# Altium PCB ESC_PCB_0.PcbDoc
Units mil, origin at the board's own origin, x right, y up, seen from the top; angles counter-clockwise.
Board outline 1100 x 2230 mil, 4 copper layers (Top Layer, GND, 11V1, Bottom Layer), stack 30.634 mil thick; 71 components, 44 nets, 282 pads, 41 vias.
Unrouted connection lines stored in the file: 15.
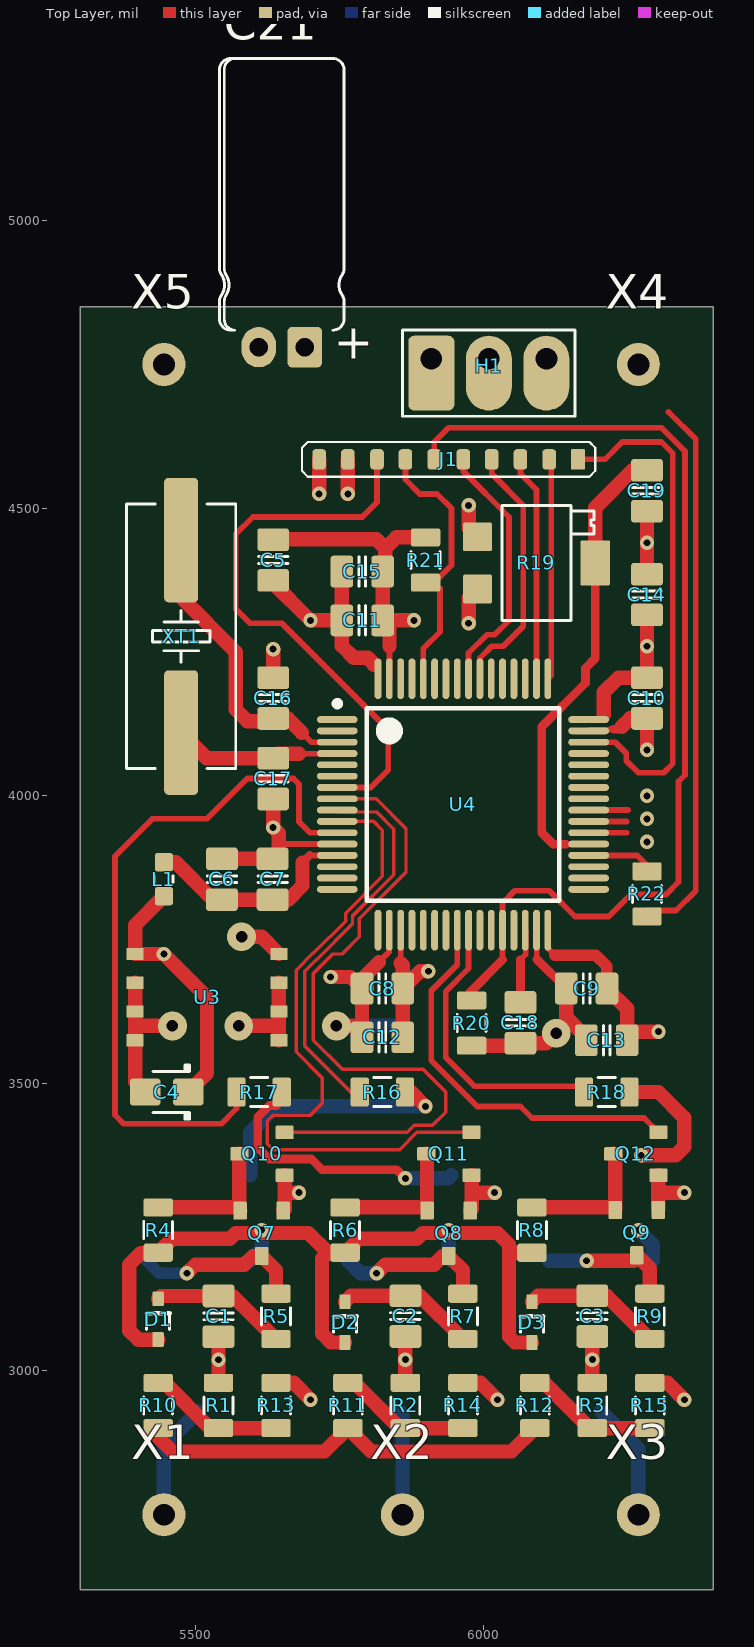
[diagram p0: Top Layer view]
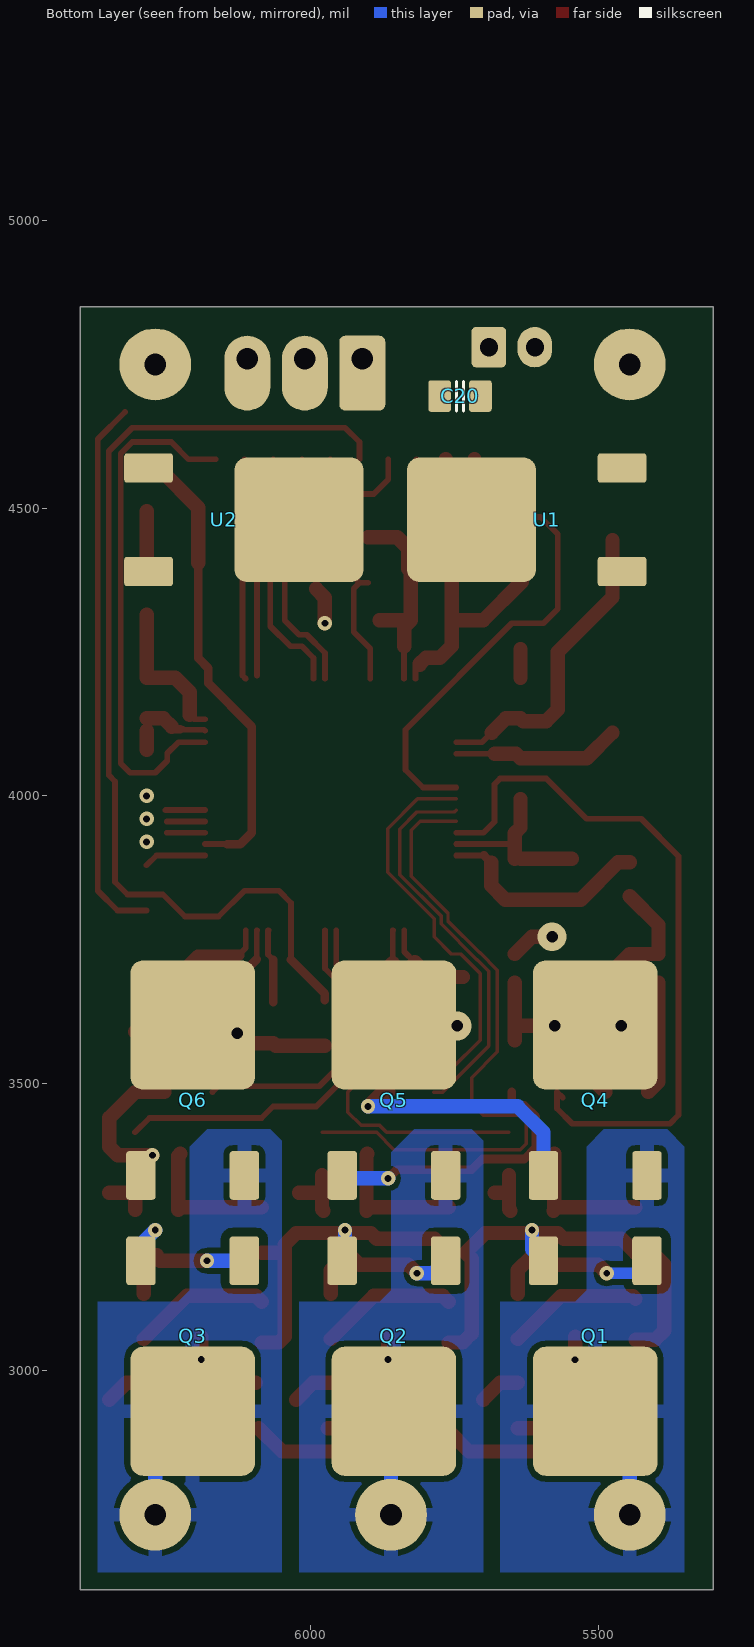
[diagram p1: Bottom Layer view, seen from below]
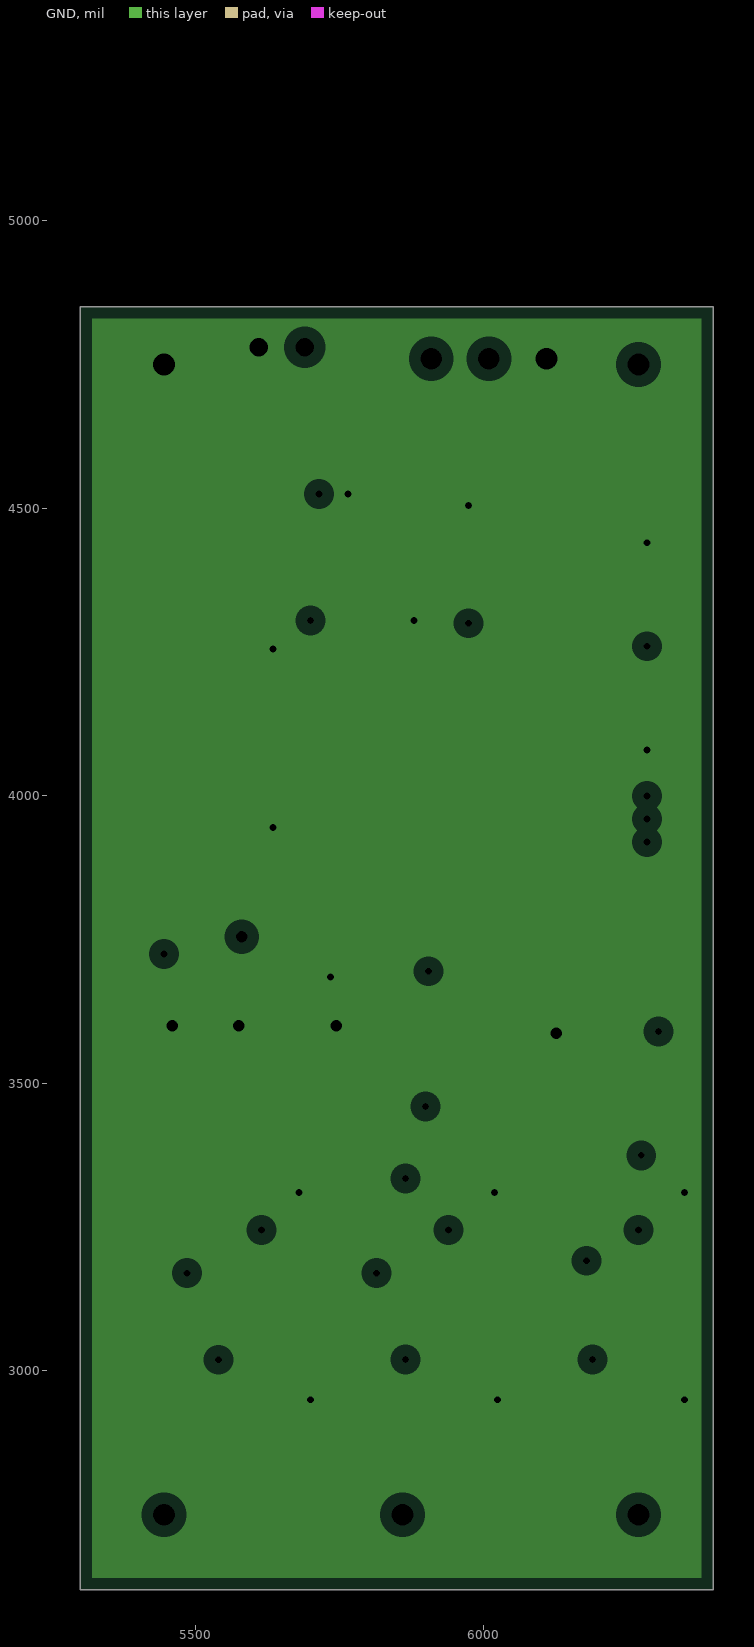
[diagram p2: GND, clearances drawn from the general rule]
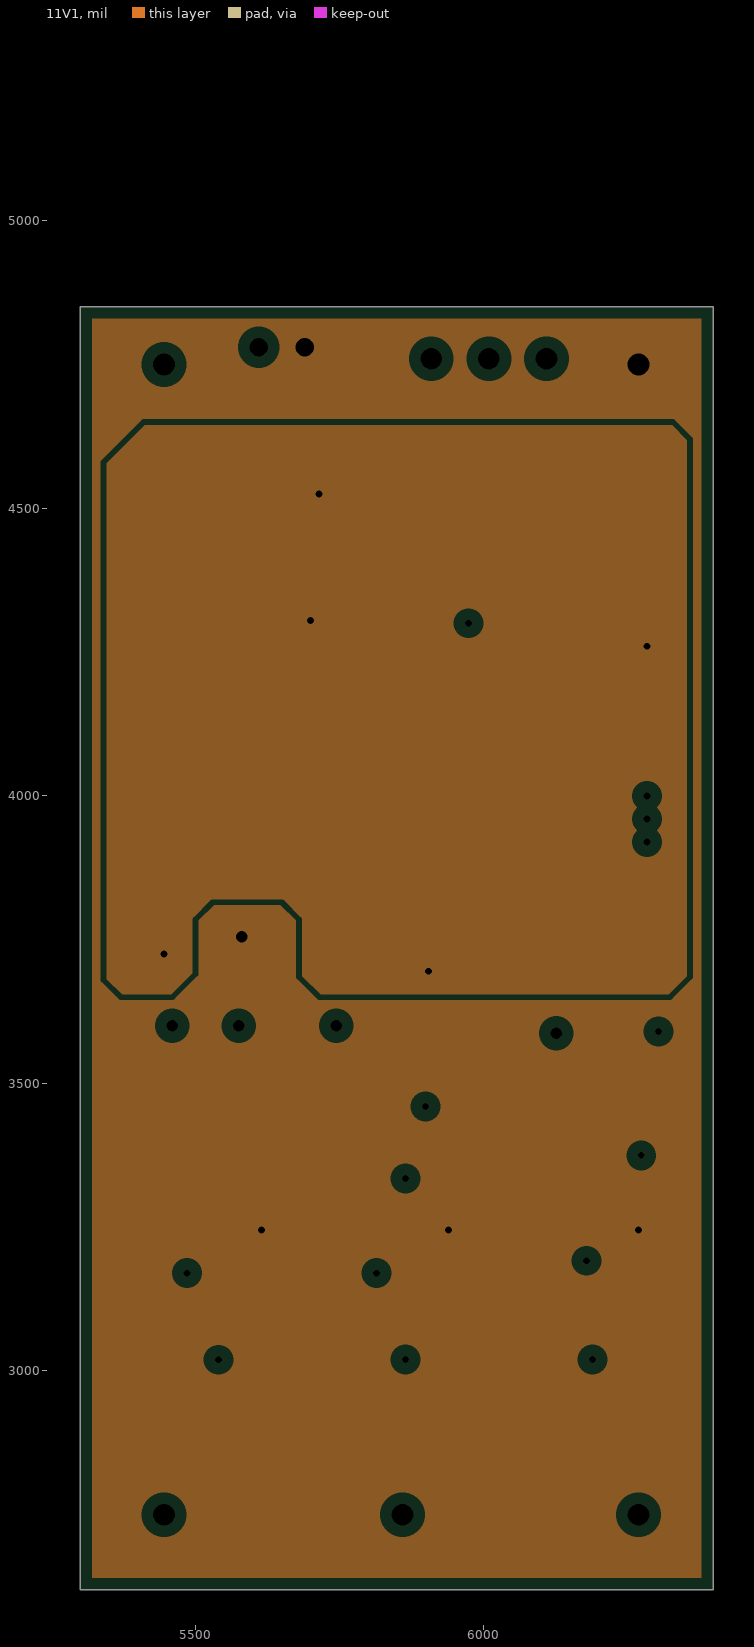
[diagram p3: 11V1, clearances drawn from the general rule]

## Layer stack, top to bottom
Top Solder: solder mask 0.4, Solder Resist, Dk 3.5
Top Layer: signal copper 1.4
Dielectric 1: core 10, FR-4, Dk 4.2
GND: plane copper 1.417, net GND
Dielectric 3: prepreg 5, Dk 4.2
11V1: plane copper 1.417, net (Multiple Nets)
Dielectric 2: core 10, Dk 4.2
Bottom Layer: signal copper 1.4
Bottom Solder: solder mask 0.4, Solder Resist, Dk 3.5

## Board outline
5300,2620 5300,4850 6400,4850 6400,2620

## Design rules (kind name [scope] priority, off if disabled: settings)
Clearance [All] p1: gap=10 ignorepadtopadclearanceinfootprint=FALSE except(0: Arc-Hole Track-Hole SMDPad-Hole THPad-Hole Via-Hole Fill-Hole Poly-Hole Region-Hole Text-Hole; 6: Arc-Arc Arc-Track Track-Track; 7: Arc-SMDPad Track-SMDPad SMDPad-SMDPad; 15: SMDPad-Poly)
PlaneClearance [All] p1: clearance=20
PlaneConnect [All] p1: planeconnectstyle=Relief reliefexpansion=20 reliefentries=4 reliefconductorwidth=10 reliefairgap=10
PolygonConnect [All] p1: connectstyle=Relief reliefconductorwidth=25 reliefentries=4 polygonreliefangle="90 Angle" airgapwidth=10
RoutingVias [All] p1: holewidth=28 width=50 viastyle="Through Hole" minholewidth=10 minwidth=15 maxholewidth=28 maxwidth=50
SilkToSilkClearance [All] p1: silktosilkclearance=7
SolderMaskExpansion [All] p1: expansion=4
Width [All] p1: maxlimit=100 minlimit=5 preferedwidth=25
27 further rules are at their usual default settings.

## Components (designator, comment, footprint, x,y, rotation, side; value= is the part's Value field where it differs from the comment)
C1 "approved sub OK" CAPC2012X135N 5540,3095 r90 top value=2µ2
C2 "approved sub OK" CAPC2012X135N 5865,3095.43 r90 top value=2µ2
C3 "approved sub OK" CAPC2012X135N 6190,3095.43 r90 top value=2µ2
C4 "10µ" CAPMP2012X150USR 5450,3485 r180 top
C5 "approved sub OK" CAPC2012X135N 5635,4410 r90 top value=4µ7
C6 "approved sub OK" CAPC2012X135N 5546,3855 r90 top value=1µ
C7 "approved sub OK" CAPC2012X135N 5634,3855 r90 top value=100n
C8 "approved sub OK" CAPC2012X135N 5825,3665 r180 top value=1µ
C9 "approved sub OK" CAPC2012X135N 6180,3665 r180 top value=1µ
C10 "approved sub OK" CAPC2012X135N 6285,4170 r270 top value=1µ
C11 "approved sub OK" CAPC2012X135N 5790,4305 r0 top value=1µ
C12 "approved sub OK" CAPC2012X135N 5825,3580 r180 top value=100n
C13 "approved sub OK" CAPC2012X135N 6215,3575 r180 top value=100n
C14 "approved sub OK" CAPC2012X135N 6285,4350 r90 top value=100n
C15 "approved sub OK" CAPC2012X135N 5790,4390 r0 top value=100n
C16 "approved sub OK" CAPC2012X135N 5635,4170 r270 top value=27p
C17 "approved sub OK" CAPC2012X135N 5635,4030 r90 top value=27p
C18 "approved sub OK" CAPC2012X135N 6065,3605.43 r270 top value=4µ7
C19 "approved sub OK" CAPC2012X135N 6285,4530.43 r270 top value=2µ2
C20 "approved sub OK" CAPC2012X135N 5740,4695 r180 bottom value=10µ
C21 "100µ" CAPAE200P550X1200_FLAT2 5650,4780 r0 top
D1 "1N4148" SOD523F 5435,3090 r270 top
D2 "1N4148" SOD523F 5760,3085 r270 top
D3 "1N4148" SOD523F 6085,3085 r270 top
H1 "*" HDR_1x3 6010.71,4735.35 r90 top
J1 "*" "SWJ-DP connector" 6195,4615 r180 top
L1 "*" INDUCTOR 5445,3855 r90 top
Q1 "*" TO-252_1 5594.96,3191.61 r270 bottom
Q2 "*" TO-252_1 5944.96,3191.61 r270 bottom
Q3 "*" TO-252_1 6294.96,3191.61 r270 bottom
Q4 "*" TO-252_1 5415,3340 r90 bottom
Q5 "*" TO-252_1 5765,3340 r90 bottom
Q6 "*" TO-252_1 6115,3340 r90 bottom
Q7 "*" TO-236 5577.6,3278.74 r0 top
Q8 "*" TO-236 5902.6,3278.74 r0 top
Q9 "*" TO-236 6230,3280 r0 top
Q10 "*" TO-236 5655,3414.8 r270 top
Q11 "*" TO-236 5980,3415 r270 top
Q12 "*" TO-236 6305,3415 r270 top
R1 "Thick Film" RESC2012X70N 5540,2940 r270 top value=44K2
R2 "Thick Film" RESC2012X70N 5865,2940 r270 top value=44K2
R3 "Thick Film" RESC2012X70N 6190,2940 r270 top value=44K2
R4 "Thick Film" RESC2012X70N 5435,3245 r90 top value=4K7
R5 "Thick Film" RESC2012X70N 5640,3095 r90 top value=1K5
R6 "Thick Film" RESC2012X70N 5760,3245 r90 top value=4K7
R7 "Thick Film" RESC2012X70N 5965,3095 r90 top value=1K5
R8 "Thick Film" RESC2012X70N 6085,3245 r90 top value=4K7
R9 "Thick Film" RESC2012X70N 6290,3095 r90 top value=1K5
R10 "Thick Film" RESC2012X70N 5435,2940 r90 top value=44K2
R11 "Thick Film" RESC2012X70N 5765,2940 r90 top value=44K2
R12 "Thick Film" RESC2012X70N 6090,2940 r90 top value=44K2
R13 "Thick Film" RESC2012X70N 5640,2940 r90 top value=10K
R14 "Thick Film" RESC2012X70N 5965,2940 r90 top value=10K
R15 "Thick Film" RESC2012X70N 6290,2940 r90 top value=10K
R16 "Thick Film" RESC2012X70N 5825,3485 r0 top value=86R6
R17 "Thick Film" RESC2012X70N 5610.63,3485 r0 top value=86R6
R18 "Thick Film" RESC2012X70N 6215,3485 r0 top value=86R6
R19 "5 Turn" TrimPot_SMD_Bourns_3214G 6092.64,4405 r180 top value=10K
R20 "Thick Film" RESC2012X70N 5980,3605 r270 top value=10K
R21 "Thick Film" RESC2012X70N 5900,4410 r90 top value=10K
R22 "Thick Film" RESC2012X70N 6285,3829.37 r270 top value=4K7
U1 "*" TO-252 5458.39,4569.96 r0 bottom
U2 "*" TO-252 6281.61,4390.04 r180 bottom
U3 "LM78L05ACM" SOIC_8 5395,3725 r270 top
U4 "" STM-LQFP64_N 5965,3985 r0 top
X1 "PHASE_A" THP_D38_T75_B125 5445,2750 r0 top
X2 "PHASE_B" THP_D38_T75_B125 5860,2750 r0 top
X3 "PHASE_C" THP_D38_T75_B125 6270,2750 r0 top
X4 "11V1" THP_D38_T75_B125 6270,4750 r0 top
X5 "GND" THP_D38_T75_B125 5445,4750 r0 top
XT1 "6.00MHz" CRYSTAL_HC49-US-SM 5475,4277.32 r90 top

## Footprints (in the part's own frame and the unit in brackets; to place one, negate y for a bottom-side part, rotate by r counter-clockwise, add the part's x,y. Pads: shape width x height; smd on the part's side, far side on the other; paste and mask are expansions set on the pad)
CAPAE200P550X1200_FLAT2 [mil]
  round 20 on Mech15: 0(0,0)
  rrect25% 60x70 hole 31.5: 1(40,0)
  oval 60x70 hole 31.5: 2(-40,0)
  silkscreen extent -108,30 108,502, body extent -107,-10 107,502, height 216
CAPC2012X135N [mm] "Chip Capacitor, Body 2.0x1.2mm, EIA 0805, IPC Medium Density"
  round 0.254 on Mech15: 0(0,0)
  rrect25% 1x1.4 smd: 1(-0.9,0) 2(0.9,0)
  Top Layer pour cut-out: -0.675,0.7 -0.475,0.9 0.475,0.9 0.675,0.7 0.675,-0.7 0.475,-0.9 -0.475,-0.9 -0.675,-0.7
  silkscreen extent -0.15,-0.65 0.15,0.65, body extent -1.1,-0.72 1.1,0.73, height 1.34
CAPMP2012X150USR [mm] "Molded body capacitor, Body 2.0x1.2mm, 0805, IPC Medium Density"
  round 0.254 on Mech15: 0(0,0)
  rrect25% 1.35x1.2 smd: 1(-0.95,0) 2(0.95,0)
  Top Layer pour cut-out: -0.4,0.8 0.4,0.8 0.4,-0.8 -0.4,-0.8
  silkscreen extent -1,-1.2 0.6,1.2, body extent -1.02,-0.67 1.03,0.68, height 1.5
CRYSTAL_HC49-US-SM [mm] "SMD Crystal HC49/US-SM package"
  round 0.508 on Mech15: 0(0,0)
  rrect25% 5.5x1.5 smd: 1(-4.25,0) 2(4.25,0)
  silkscreen extent -5.84,-2.41 5.84,2.41, body extent -6.4,-2.41 6.4,2.42, height 4.29
HDR_1x3 [mil]
  rrect25% 130x80 smd: 1(-0.35,100.71)
  rrect25% 130x80 smd far side: 1(-0.35,100.71)
  rrect25% 60x60 hole 38: 1(24.65,100.71)
  oval 130x80 smd: 2(-0.35,0.71) 3(-0.35,-99.29)
  oval 130x80 smd far side: 2(-0.35,0.71) 3(-0.35,-99.29)
  round 60 hole 38: 2(24.65,0.71) 3(24.65,-99.29)
  silkscreen extent -75,-149 75,151
INDUCTOR [mm] "Chip Ferrite, Body 1.6x0.8mm, 0603, IPC Medium Density"
  round 0.254 on Mech15: 0(0,0)
  rrect25% 0.8x0.8 smd: 1(-0.75,0) 2(0.75,0)
  Top Layer pour cut-out: -0.6,0.5 -0.4,0.7 0.4,0.7 0.6,0.5 0.6,-0.5 0.4,-0.7 -0.4,-0.7 -0.6,-0.5
  silkscreen extent -0.15,-0.41 0.15,0.41, body extent -0.87,-0.47 0.88,0.48, height 0.95
RESC2012X70N [mm] "Chip Resistor, Body 2.0x1.2mm, EIA 0805, IPC Medium Density"
  round 0.254 on Mech15: 0(0,0)
  rrect25% 0.8x1.3 smd: 1(-1,0) 2(1,0)
  Top Layer pour cut-out: -0.725,0.65 -0.525,0.85 0.525,0.85 0.725,0.65 0.725,-0.65 0.525,-0.85 -0.525,-0.85 -0.725,-0.65
  silkscreen extent -0.38,-0.64 0.38,0.64, body extent -1.1,-0.67 1.1,0.68, height 0.69
SOD523F [mm] "SOD-523F; 2 Leads; Body 1.3 x 0.9 mm, (LxW)"
  round 0.508 on Mech15: 0(0,0)
  rrect20% 0.65x0.5 smd: A(0.9,0) K(-0.9,0)
  Top Layer pour cut-out: -0.725,-0.25 -0.725,0.25 -0.525,0.45 0.525,0.45 0.725,0.25 0.725,-0.25 0.525,-0.45 -0.525,-0.45
  silkscreen extent -0.25,-0.51 0.45,0.51, body extent -0.85,-0.45 0.85,0.45, height 0.7
SOIC_8 [mm] "SOIC 8 Pin"
  rect 0.55x0.76 smd: 1(0,0) 2(1.27,0) 3(2.54,0) 4(3.81,0) 5(3.81,6.35) 6(2.54,6.35) 7(1.27,6.35) 8(0,6.35)
  body extent -0.6,0.08 4.41,6.27, height 1.76
STM-LQFP64_N [mm] "Thin QFP, 64-Leads, Body 10x10mm, Pitch 0.5mm, IPC Medium Density"
  oval 1.8x0.3 smd: 1(-5.55,3.75) 2(-5.55,3.25) 3(-5.55,2.75) 4(-5.55,2.25) 5(-5.55,1.75) 6(-5.55,1.25) 7(-5.55,0.75) 8(-5.55,0.25) 9(-5.55,-0.25) 10(-5.55,-0.75) 11(-5.55,-1.25) 12(-5.55,-1.75) 13(-5.55,-2.25) 14(-5.55,-2.75) 15(-5.55,-3.25) 16(-5.55,-3.75) 33(5.55,-3.75) 34(5.55,-3.25) 35(5.55,-2.75) 36(5.55,-2.25) 37(5.55,-1.75) 38(5.55,-1.25) 39(5.55,-0.75) 40(5.55,-0.25) 41(5.55,0.25) 42(5.55,0.75) 43(5.55,1.25) 44(5.55,1.75) 45(5.55,2.25) 46(5.55,2.75) 47(5.55,3.25) 48(5.55,3.75)
  oval 0.3x1.8 smd: 17(-3.75,-5.55) 18(-3.25,-5.55) 19(-2.75,-5.55) 20(-2.25,-5.55) 21(-1.75,-5.55) 22(-1.25,-5.55) 23(-0.75,-5.55) 24(-0.25,-5.55) 25(0.25,-5.55) 26(0.75,-5.55) 27(1.25,-5.55) 28(1.75,-5.55) 29(2.25,-5.55) 30(2.75,-5.55) 31(3.25,-5.55) 32(3.75,-5.55) 49(3.75,5.55) 50(3.25,5.55) 51(2.75,5.55) 52(2.25,5.55) 53(1.75,5.55) 54(1.25,5.55) 55(0.75,5.55) 56(0.25,5.55) 57(-0.25,5.55) 58(-0.75,5.55) 59(-1.25,5.55) 60(-1.75,5.55) 61(-2.25,5.55) 62(-2.75,5.55) 63(-3.25,5.55) 64(-3.75,5.55)
  silkscreen extent -5.67,-4.25 4.25,4.57, body extent -5,-5 5,5, height 1.6
"SWJ-DP connector" [mm] "10 pin SWJ-DP PCB connector"
  rrect8% 0.6x0.9 smd: 1(0.762,0.762)
  rrect50% 0.6x0.9 smd: 2(2.032,0.762) 3(3.302,0.762) 4(4.572,0.762) 5(5.826,0.762) 6(7.112,0.762) 7(8.382,0.762) 8(9.636,0.762) 9(10.922,0.762) 10(12.192,0.762)
  silkscreen extent 0,0 12.95,1.52
THP_D38_T75_B125 [mil] "Thru-Hole Pad with 75mil top and 125mil bottom annular rings"
  round 75 / inner round 75 / far side round 125 hole 38: 1(0,0)
TO-236 [mm] "TO-236"
  rrect20% 0.6x0.8 smd: 1(0,0) 2(1.9,0) 3(0.95,-2)
  body extent -0.55,-2.25 2.45,0.25, height 1.11
TO-252 [mm] "NDP Package  3-Pin TO-252"
  rrect20% 2.15x1.3 smd: 1(0,4.57) 3(0,0)
  rrect20% 5.7x5.5 smd: 2(6.645,2.285)
  body extent -0.34,-1.08 7.42,5.65, height 2.4
TO-252_1 [mm] "NDP Package  3-Pin TO-252"
  rrect20% 2.15x1.3 smd: 1(0,4.57) 3(0,0)
  rrect20% 5.7x5.5 smd: 2(6.645,2.285)
  body extent -0.89,-1.08 9.21,5.65, height 2.41
TrimPot_SMD_Bourns_3214G [mm] "Bourns- 3214G - TRIMMER"
  rrect10% 1.27x1.27 smd: 1(2.6,1.15) 3(2.6,-1.15)
  rrect10% 1.3x2 smd: 2(-2.6,0)
  silkscreen extent -2.54,-2.54 1.52,2.54, body extent -3,-2.4 3,2.4, height 3.9

## Part data
C1 C2 C3 C19: library part CAPC_2u2_0805, "Capacitor SMD Cer 2.2uF 10% 16V X7R 0805", Manufacturer 1=Kemet, Manufacturer Part Number 1=C0805C225K4RACTU, Package / Case="0805 (2012 metric)", Ratings="16V; X7R", Supplier Part Number 1=399-3523-1-ND, Tolerance=±10%, SCDType=undef, Supplier 1=Digi-Key
C4: library part CAPT_10u_0805_10V, "Capacitor SMD Tantalum 10uF 20% 10V 0805", Manufacturer 1="AVX Corporation", Manufacturer Part Number 1=TAJP106M010RNJ, Package / Case="0805 (2012 metric)", Ratings=10V, Supplier Part Number 1=478-3281-1-ND, Tolerance=±20%, Material=Tantalum, SCDType=spec, Supplier 1=Digi-Key
C5 C18: library part CAPC_4u7_0805, "Capacitor SMD Cer 4.7uF 10% 16V X5R 0805", Manufacturer 1="Taiyo Yuden", Manufacturer 2="Samsung Electro-Mechanics America, Inc", Manufacturer 3=Kemet, Manufacturer 4="Murata Electronics North America", Manufacturer 5="TDK Corporation", Manufacturer Part Number 1=EMK212BJ475KG-T, Manufacturer Part Number 2=CL21A475KOFNNNE, Manufacturer Part Number 3=C0805C475K4PACTU, Manufacturer Part Number 4=GRM21BR61C475MA88L, Manufacturer Part Number 5=C2012X5R1C475K125AC, Operating Temperature="-55°C ~ 85°C", Package / Case="0805 (2012 Metric)", Ratings="16V; X5R", Supplier Part Number 1=587-1294-1-ND, Tolerance=±10%, ComponentLink1Description=http://www.yuden.co.jp/productdata/catalog/en/mlcc01_e.pdf, ComponentLink1URL=http://www.yuden.co.jp/productdata/catalog/en/mlcc01_e.pdf, ComponentLink2Description=http://www.samsungsem.com/servlet/FileDownload?type=spec&file=CL21A475KOFNNNE.pdf, ComponentLink2URL=http://www.samsungsem.com/servlet/FileDownload?type=spec&file=CL21A475KOFNNNE.pdf, ComponentLink3Description=http://capacitoredge.kemet.com/capedge2/DataSheet?pn=C0805C475K4PACTU, ComponentLink3URL=http://capacitoredge.kemet.com/capedge2/DataSheet?pn=C0805C475K4PACTU, ComponentLink4Description=http://psearch.murata.com/capacitor/product/GRM21BR61C475MA88#.pdf, ComponentLink4URL=http://psearch.murata.com/capacitor/product/GRM21BR61C475MA88#.pdf, ComponentLink5Description=http://product.tdk.com/capacitor/mlcc/en/documents/mlcc_commercial_general_en.pdf, ComponentLink5URL=http://product.tdk.com/capacitor/mlcc/en/documents/mlcc_commercial_general_en.pdf, Material=ceramic, RoHS 1="RoHS Compliant", RoHS 2="RoHS Compliant", RoHS 3="RoHS Compliant", RoHS 4="RoHS Compliant", RoHS 5="RoHS Compliant", SCDType=spec, Size / Dimension="0.079\" L x 0.049\" W (2.00mm x 1.25mm)", Supplier 1=Digi-Key, Supplier 2=Digi-Key, Supplier 3=Digi-Key, Supplier 4=Digi-Key, Supplier 5=Digi-Key, Supplier Part Number 2=1276-1065-1-ND, Supplier Part Number 3=399-8101-1-ND, Supplier Part Number 4=490-7215-1-ND, Supplier Part Number 5=445-7640-1-ND, Thickness (Max)="0.053\" (1.35mm)"
C6 C8 C9 C10 C11: library part CAPC_1u_0805_X7R_16V_10%, "Capacitor SMD Cer 1uF 10% 16V X7R 0805", Manufacturer 1=Yageo, Manufacturer 2=Kemet, Manufacturer 3="Samsung Electro-Mechanics America, Inc", Manufacturer 4="TDK Corporation", Manufacturer Part Number 1=CC0805KKX7R7BB105, Manufacturer Part Number 2=C0805C105K4RACTU, Manufacturer Part Number 3=CL21B105KOFNNNE, Manufacturer Part Number 4=C2012X7R1C105K125AA, Package / Case="0805 (2012 metric)", Ratings="16V; X7R", Supplier Part Number 1=311-1365-6-ND, Temperature Coefficient=X7R, Tolerance=±10%, ComponentLink1Description=http://www.yageo.com/documents/recent/UPY-GPHC_X7R_6.3V-to-50V_8.pdf, ComponentLink1URL=http://www.yageo.com/documents/recent/UPY-GPHC_X7R_6.3V-to-50V_8.pdf, ComponentLink2Description=http://www.kemet.com/datasheets&C0805C105K4RACTU, ComponentLink2URL=http://www.kemet.com/datasheets&C0805C105K4RACTU, ComponentLink3Description=http://www.samsungsem.com/servlet/FileDownload?type=spec&file=CL21B105KOFNNNE.pdf, ComponentLink3URL=http://www.samsungsem.com/servlet/FileDownload?type=spec&file=CL21B105KOFNNNE.pdf, ComponentLink4Description=http://product.tdk.com/capacitor/mlcc/en/documents/mlcc_commercial_general_en.pdf, ComponentLink4URL=http://product.tdk.com/capacitor/mlcc/en/documents/mlcc_commercial_general_en.pdf, Material=ceramic, RoHS 1="RoHS Compliant", RoHS 2="RoHS Compliant", RoHS 3="RoHS Compliant", RoHS 4="RoHS Compliant", SCDType=spec, Supplier 1=Digi-Key, Supplier 2=Digi-Key, Supplier 3=Digi-Key, Supplier 4=Digi-Key, Supplier Part Number 2=399-1284-6-ND, Supplier Part Number 3=1276-1026-6-ND, Supplier Part Number 4=445-1358-6-ND
C7 C12 C13 C14 C15: library part CAPC_100n_0805_X7R_50V_10%, "Capacitor SMD Cer 100nF 10% 50V X7R 0805", Manufacturer 1=Kemet, Manufacturer Part Number 1=C0805C104K5RACTU, Package / Case="0805 (2012 metric)", Ratings="50V; X7R", Supplier Part Number 1=399-1170-1-ND, Tolerance=±10%, Material=ceramic, SCDType=undef, Supplier 1=Digi-Key
C16 C17: library part CAPC_27p_0805_NP0_50V_5%, "Capacitor SMD Cer 27pF 5% 50V NP0 0805", Manufacturer 1="Panasonic - ECG", Manufacturer Part Number 1=ECJ-2VC1H270J, Operating Temperature="-55°C ~ 125°C", Package / Case="0805 (2012 metric)", Ratings="50V; NP0", Supplier Part Number 1=PCC270CGCT-ND, Tolerance=±5%, SCDType=undef, Supplier 1=Digi-Key
C20: library part CAPC_10u_0805_16V, "Capacitor SMD Cer 10uF 10% 16V X7R 0805", Manufacturer 1=Samsung, Manufacturer Part Number 1=CL21B106KBN, Package / Case="0805 (2012 metric)", Ratings="16V; X7R", Tolerance=±10%, Material=ceramic, SCDType=undef
C21: library part CAPE_100u_16V_THD, "Capacitor THD Electrolytic 100uF 20% 16V Radial", Manufacturer="Panasonic - ECG", Manufacturer Part Number=ECA-1CM101, Package / Case="Radial - Through hole", Ratings=16V, Supplier Part Number 1=P5138-ND, Tolerance=±20%, Material="Aluminum Electrolytic", SCDType=spec, Supplier 1=Digi-Key
D1 D2 D3: library part DIODE_1N4148_200mA_SOD523F, "Diode SMD small signal 0.2A SOD-523F", Manufacturer 1="Fairchild Semiconductor", Manufacturer Part Number 1=1N4148WT, Package / Case="SC-79, SOD-523F", Ratings="Vr=75V; Vf=1V@10mA; Io=200mA", Supplier Part Number 1=1N4148WTCT-ND, ComponentLink1Description=http://www.fairchildsemi.com/ds/1N/1N914BWT.pdf, ComponentLink1URL=http://www.fairchildsemi.com/ds/1N/1N914BWT.pdf, Material=Si, SCDType=source, Supplier 1=Digi-Key
H1: library part Header3P, "Header, 2-pin"
J1: library part "SWJ-Debug Port", "10 pin Serial Wire JTAG Debug Port"
L1: library part Inductor, "0603 Inductor"
Q1 Q2 Q3 Q4 Q5 Q6: library part PHD82N, "PHD82N N-Channel MOSFET transistor"
Q7 Q8 Q9 Q10 Q11 Q12: library part PDTC143Z, "NPN Resistor-Equipped Transistor (RET)"
R1 R2 R3 R10 R11 R12: library part RES_44K2_0805_1%, "Resistor SMD chip 44.2k Ohm 0.125W 1% 0805", Manufacturer 1=Vishay/Dale, Manufacturer Part Number 1=CRCW080544K2FKEA, Package / Case="0805 (2012 metric)", Ratings=1/8W, Supplier Part Number 1=541-44.2KCCT-ND, Tolerance=±1%, SCDType=spec, Supplier 1=Digi-Key
R4 R6 R8: library part RES_4K7_0805_1%, "Resistor SMD chip 4.7k Ohm 0.125W 1% 0805", Manufacturer 1=Vishay/Dale, Manufacturer Part Number 1=CRCW08054K70FKEA, Package / Case="0805 (2012 metric)", Ratings=1/8W, Supplier Part Number 1=541-4.70KCCT-ND, Tolerance=±1%, SCDType=spec, Supplier 1=Digi-Key
R5 R7 R9: library part RES_1K5_0805_1%, "Resistor SMD chip 1.5k Ohm 0.125W 1% 0805", Manufacturer 1=Vishay/Dale, Manufacturer Part Number 1=CRCW08051K50FKEA, Package / Case="0805 (2012 metric)", Ratings=1/8W, Supplier Part Number 1=541-1.50KCCT-ND, Tolerance=±1%, SCDType=spec, Supplier 1=Digi-Key
R13 R14 R15: library part RES_10K_0805_1%, "Resistor SMD chip 10k Ohm 0.125W 1% 0805", Manufacturer 1=Vishay/Dale, Manufacturer Part Number 1=CRCW080510K0FKEA, Package / Case="0805 (2012 metric)", Ratings=1/8W, Supplier Part Number 1=541-10.0KCCT-ND, Tolerance=±1%, Material="Thick Film", SCDType=spec, Supplier 1=Digi-Key
R16 R17 R18: library part RES_86R6_0805_1%, "Resistor SMD chip 86.6 Ohm 0.125W 1% 0805", Manufacturer=Vishay/Dale, Manufacturer Part Number=CRCW080586R6FKEA, Package / Case="0805 (2012 metric)", Ratings=1/8W, Supplier Part Number 1=541-86.6CCT-ND, Tolerance=±1%, SCDType=spec, Supplier 1=Digi-Key
R19: library part RES_TRIMMER_10K_5T_SMD, "Trimmer SMD 10K 250mW 5-turn Side-adjust", Manufacturer 1="Bourns Inc.", Manufacturer Part Number 1=3214G-1-103E, Ratings="5 turn variable cermet", Supplier Part Number 1=3214G-1-103ECT-ND, Tolerance=10%, Number of Turns=5, SCDType=spec, Supplier 1=Digi-Key
R20 R21: library part RES_10K_0805_5%, "Resistor SMD chip 10k Ohm 0.125W 5% 0805", Manufacturer 1=Yageo, Manufacturer Part Number 1=RC0805JR-0710KL, Package / Case="0805 (2012 metric)", Ratings="1/8 W", Supplier Part Number 1=311-10KARCT-ND, Tolerance=±5%, Material="Thick Film", SCDType=spec, Supplier 1=Digi-Key
R22: library part RES_4K7_0805_5%, "Resistor SMD chip 4.7k Ohm 0.125W 5% 0805", Manufacturer 1=Yageo, Manufacturer Part Number 1=RC0805JR-074K7L, Package / Case="0805 (2012 metric)", Ratings="1/8 W", Supplier Part Number 1=311-4.7KARCT-ND, Tolerance=±5%, Material="Thick Film", SCDType=spec, Supplier 1=Digi-Key
U1 U2: library part LM78M05CDT, "LM78L05"
U3: "100-mA Fixed Output Linear Regulator"
U4: library part STM32F401RBT6, "ARM Cortex-M4 32-bit MCU+FPU, 105 DMIPS, 128 kB Flash, 64 kB Internal RAM, 48 I/Os, 64-pin LQFP, -40 to 85 degC, Tray", I/Os (High Current)=48, Manufacturer=STMicroelectronics, Operating Frequency(F) (Processor speed) (MHz)=84, Supplier Part Number 1=19X6220, Supply Voltage(Vcc) max (V)=3.6, Supply Voltage(Vcc) min (V)=1.8, ComponentLink1Description="Manufacturer URL", ComponentLink1URL=http://www.st.com/web/en/home.html, ComponentLink2Description=Datasheet, ComponentLink2URL=http://www.st.com/st-web-ui/static/active/en/resource/technical/document/data_brief/DM00071938.pdf, ComponentLink3Description="Package Specification", ComponentLink3URL=http://www.st.com/st-web-ui/static/active/en/resource/technical/document/datasheet/DM00037051.pdf, Core="ARM Cortex-M4", DatasheetVersion="Rev. 1", FLASH Size (Prog) (kB)=128, Internal RAM Size (kB)=64, Mounting Technology="Surface Mount", PackageDescription="64-Pin Low Profile Quad Flat Package, 10 x 10 mm Body, 0.5 mm Pitch", PackageReference=LQFP64, PackageVersion="Rev. 4, 06/2013", Packing=Tray, PartNumber=STM32F401RBT6, Supplier 1=Newark, Supplier 2=Mouser, Supplier Part Number 2=511-STM32F401RBT6
X1 X2 X3 X4 X5: library part Term1
XT1: library part Crystal_6MHz_HC49/US, "Resonator Ceramic 6.00 MHz 30ppm", Frequency=6MHz, Frequency Stability=±50ppm, Frequency Tolerance=±30ppm, Load Capacitance=18pF, Manufacturer 1="CTS-Frequency Controls", Manufacturer Part Number 1=ATS060BSM-1, Operating Mode=Fundamental, Operating Temperature="-20°C ~ 70°C", Package / Case=HC49/US-SM, Ratings="6.00 MHz", Supplier Part Number 1=CTX882CT-ND, ComponentLink1Description=http://www.ctscorp.com/components/Datasheets/008-0309-0.pdf, ComponentLink1URL=http://www.ctscorp.com/components/Datasheets/008-0309-0.pdf, Mounting Type="Surface Mount", Parameter Name="0.169\" (4.30mm)", SCDType=spec, Size / Dimension="0.437\" L x 0.190\" W (11.10mm x 4.83mm)", Supplier 1=Digi-Key, Type="MHz Crystal"

## Via types
v1: diameter 25, hole 12, Top Layer to Bottom Layer, 16 vias
v2: diameter 25, hole 12, Top Layer to GND, 14 vias
v3: diameter 25, hole 12, Top Layer to 11V1, 6 vias
v4: diameter 50, hole 20, Top Layer to Bottom Layer, 5 vias

## Nets (pads, with @x,y where several pads share a name; then routed paths per layer and width w, separated by ;. In a path a pad name is that pad's centre, name@x,y a point inside that pad or via, vN(x,y) a via of type N, cw(c..) or ccw(c..) an arc to the next point about the centre after c; other vN are vias at no path point)
3V3: C4.1 C5.1 C8.1 C9.1 C10.1 C11.1 C12.1 C13.1 C14.1 C15.1 J1.10 L1.1 U3.1 U4.19 U4.32 U4.48 U4.64 | length 1748.9
  Top Layer w10: U4.64 U4.64@5817.36,4227.64 ; U4.19 5857,3766.23 5857,3709 ; U4.32 6112.64,3735.36 6125,3723 ; U4.48@6183.5,4132.95 6202.5,4132.95 6210,4140.45
  Top Layer w20: 6125,3723 6196,3723 6215.43,3703.57 C9.1
  Top Layer w25: L1.1 5395,3775.47 U3.1 v3(5445,3725) 5520,3650 5520,3517.6 C4.1 ; C5.1@5632.72,4372.28 v3(5700,4305) C11.1 ; v3(5715,4525) J1.10 ; C15.1 C11.1 ; 5809.86,4227.64 5809.86,4229.42 5799.28,4240 5775,4240 5754.57,4260.43 C11.1 ; 5857,3709 5860.43,3705.57 C8.1 ; C12.1 C8.1 ; v3(5905,3695) 5890.43,3695 C8.1 ; 6210,4140.45 6210,4180 6235.43,4205.43 C10.1 v3(6285,4260) C14.1 ; C9.1 6250.43,3630 C13.1 6265.43,3590 v3(6305,3590)
5V: C20.1 H1.1 U1.2 U2.2
11V1: C21.1 D1.A D2.A D3.A Q1.3 Q2.3 Q3.3 R4.1 R6.1 R8.1 R19.1 U1.1 U2.1 U3.8 X4.1 | length 1621.9
  Top Layer w25: D1.A 5400.43,3054.57 5385,3070 5385,3185 5405,3205 5434.37,3205 R4.1 5459.37,3230 5560,3230 5570,3240 5696.26,3240 5730.63,3205.63 5720,3195 5720,3065 5735.43,3049.57 D2.A ; v4(5580,3755) 5615,3755 U3.8 ; R6.1 5784.37,3230 5885,3230 5895,3240 6025,3240 6045,3220 6045,3205 ; v1(5975,4300) 5975,4344.45 R19.1 ; D3.A 6055.43,3049.57 6045,3060 6045,3205 ; R8.1 6045.63,3205.63 6045,3205
  Bottom Layer w25: Q1.3 5615,3211.65 v1(5615,3245) ; v1(5940,3245) 5940,3196.57 Q2.3 ; v1(6270,3245) 6294.96,3220.04 Q3.3
BOOT0: J1.7 R21.1 U4.60 | length 475.7
  Top Layer w10: J1.7 5865,4550 5890,4525 5920,4525 5945,4500 5945,4400.87 R21.1@5914.76,4370.63 ; U4.60 5896.1,4256.1 5925,4285 5925,4360.39 R21.1@5914.76,4370.63 ; R21.1 R21.1@5914.76,4370.63
BOOT1: J1.6 R20.1 U4.28 | length 1799.2
  Top Layer w10: J1.6 5915,4615 5940,4640 6310,4640 6351,4599 6351,4036 6340,4025 6340,3850 6318.38,3828.38 6256.75,3828.38 6218.37,3790 6160,3790 6115,3835 6055,3835 6033.9,3813.9 U4.28 6033.9,3715.1 6034,3715
  Top Layer w15: R20.1@5975,3644.37 5975,3656 6034,3715
GATE_AH: Q1.1 Q7.3 R5.2 | length 297.3
  Top Layer w25: v1(5485,3170) 5500,3185 5585,3185 5600,3200 Q7.3 5640,3175 R5.2
  Bottom Layer w20: Q1.1 5436.65,3170 v1(5485,3170)
GATE_AL: Q4.1 R16.2 | length 444.7
  Top Layer w25: R16.2 5875,3485 v1(5900,3460)
  Bottom Layer w25: Q4.1 5595,3340.08 5595,3415 5640,3460 v1(5900,3460)
GATE_BH: Q2.1 Q8.3 R7.2 | length 272.3
  Top Layer w25: v1(5815,3170) 5830,3185 5915,3185 5930,3200 Q8.3 5965,3175 R7.2
  Bottom Layer w25: Q2.1 5786.65,3170 v1(5815,3170)
GATE_BL: Q5.1 R17.2 | length 481.9
  Top Layer w15: R17.2@5641.26,3461.5 5628.17,3461.5 5608.5,3441.83 5608.5,3388.17 5628.17,3368.5 5701.5,3368.5 5720,3350 5850,3350 v1(5865,3335) ; R17.2@5641.52,3461.75 5650,3470.24 R17.2
  Bottom Layer w25: v1(5865,3335) 5939.92,3335 Q5.1
GATE_CH: Q3.1 Q9.3 R9.2 | length 234.9
  Top Layer w25: v1(6180,3191.61) 6261.61,3191.61 6267.4,3197.4 Q9.3 6290,3178.66 R9.2
  Bottom Layer w25: Q3.1 v1(6180,3191.61)
GATE_CL: Q6.1 R18.2 | length 245.5
  Top Layer w25: R18.2 6305,3485 6350,3440 6350,3390 6335,3375 v1(6275,3375)
GND: C4.2 C5.2 C6.2 C7.2 C8.2 C9.2 C10.2 C11.2 C12.2 C13.2 C14.2 C15.2 C16.1 C17.1 C18.2 C19.2 C20.2 C21.2 H1.3 J1.9 Q4.2 Q5.2 Q6.2 Q7.2 Q8.2 Q9.2 Q10.2 Q11.2 Q12.2 R13.2 R14.2 R15.2 R19.3 R20.2 R21.2 U1.3 U2.3 U3.2 U3.3 U3.4 U3.5 U3.6 U3.7 U4.12 U4.18 U4.31 U4.47 U4.63 X5.1 | length 3062.2
  Top Layer w10: 5645,3918 5646.9,3916.1 U4.12 ; 5819,3711 5837.05,3729.05 U4.18 ; U4.63@5837.36,4203.5 5837.36,4260 ; U4.31 6093.5,3765.95 6093.5,3716.07 ; U4.47 6185.28,4114.73 6221.72,4114.73 6221.72,4116 6227,4116
  Top Layer w15: 6093.5,3716.07 C9.2 ; 6227,4116 6237,4116 6241,4120
  Top Layer w25: U3.2 U3.3 5395,3600 ; C4.2 5395,3502.6 U3.4 5395,3600 ; v4(5460,3600) 5395,3600 ; C6.2 C7.2 ; v4(5575,3600) 5645,3600 ; C17.1 v2(5635,3945) 5645,3935 5645,3918 C7.2@5645,3890.43 ; C16.1 v2(5635,4255) ; C5.2@5635,4446 5814,4446 5830,4430 ; R13.2 5670.63,2979.37 v2(5700,2950) ; U3.5 5645,3600 ; U3.7 U3.6 5645,3600 ; Q7.2 5655,3281.34 5655,3310 ; Q10.2 5655,3310 ; v2(5680,3310) 5655,3310 ; v2(5735,3685) 5769.57,3685 C8.2 ; v4(5745,3600) 5789.57,3600 C8.2 ; v2(5765,4525) J1.9 ; 5819,3711 5789.57,3681.57 C8.2 ; 5837.36,4260 5837.36,4293.07 C11.2 ; v2(5880,4305) C11.2 ; R21.2 5849.37,4449.37 5830,4430 ; R14.2 5995.63,2979.37 v2(6025,2950) ; R20.2@5975,3565.63 R20.2 6060.63,3565.63 C18.2 6110,3570 v4(6127.28,3587.28) 6144.57,3604.57 6144.57,3614.93 ; v2(5975,4505) 5975,4465.55 R19.3 ; Q8.2 5980,3281.34 5980,3310 ; Q11.2 5980,3310 ; v2(6020,3310) 5980,3310 ; C9.2 6144.57,3614.93 ; C13.2 6179.57,3579.93 6144.57,3614.93 ; 6241,4120 6255.57,4134.57 C10.2 ; v2(6285,4080) 6285,4112.95 ; C14.2 v2(6285,4440) C19.2 ; R15.2 6320.63,2979.37 v2(6350,2950) ; Q9.2 6304.8,3310 ; Q12.2 6304.8,3340 6304.8,3310 ; v2(6350,3310) 6304.8,3310 ; C11.2 C15.2 5830,4394.57 5830,4430
  Bottom Layer w25: v4(5745,3600) 5853.35,3600 Q5.2
HSA: Q10.1 U4.8 | length 1181.8
  Top Layer w6: Q10.1 5867.83,3414.8 5880.03,3427 5912,3427 5935,3450 5935,3485 5895,3525 5755,3525 5705,3575 5705,3691.06 5738.94,3725 5755,3725 5785,3755 5785,3786.16 5866,3867.16 5866,3942.84 5814,3994.84 U4.8
HSB: Q11.1 U4.10 | length 1160.1
  Top Layer w6: U4.10 5809.53,3955.47 5825,3940 5825,3860.1 5761,3796.1 5761,3782.26 5705.74,3727 5705.03,3727 5675,3696.97 5675,3555 5720,3510 5720,3465 5700,3445 5635,3445 5625,3435 5625,3395 5635,3385 5855,3385 5885,3415 Q11.1
HSC: Q12.1 U4.24 | length 692
  Top Layer w10: U4.24 5955.16,3706.27 5910,3661.11 5910,3540 5990,3460 6065,3460 6085,3440 6280,3440 Q12.1
JTCK/SWCLK: J1.2 U4.49 | length 385.4
  Top Layer w10: U4.49 6118.5,4209.36 6118.5,4581.5 J1.2
JTDI: J1.3 U4.50 | length 387.6
  Top Layer w10: J1.3 6065,4560 6092.9,4532.1 U4.50@6092.9,4209
JTDO/TRACESWO: J1.4 U4.55 | length 447.1
  Top Layer w10: U4.55@5994.84,4203.5 5994.84,4239.84 6015,4260 6035,4260 6070,4295 6070,4505 6015,4560 J1.4
JTMS/SWDIO: J1.1 U4.46 | length 907.5
  Top Layer w10: J1.1 6212,4585 6242,4615 6310,4615 6330,4595 6330,4056 6314,4040 6270,4040 6249,4061 6249,4074 6229.73,4093.27 U4.46
LSA: R16.1 U4.9 | length 682.6
  Top Layer w6: U4.9 5749.78,3971.88 5815.04,3971.88 5845,3941.92 5845,3863.13 5773,3791.13 5773,3777.29 5710.71,3715 5710,3715 5690,3695 5690,3565 5770,3485 R16.1
LSB: R17.1 U4.11 | length 1241
  Top Layer w10: R17.1@5561.26,3475 R17.1 5571.26,3456.26 5545,3430 5375,3430 5360,3445 5360,3895 5425,3960 5520,3960 5590,4030 5670.43,4030 5670.43,4029.57 5680,4020 5680,3955 5699.21,3935.79 U4.11
LSC: R18.1 U4.25 | length 498.5
  Top Layer w10: U4.25 5974.84,3699.84 5935,3660 5935,3545 5985,3495 6160.63,3495 R18.1@6170.63,3485
NetC1_2: C1.2 D1.K R5.1 | length 238.1
  Top Layer w25: D1.K 5440,3130.43 C1.2 5564.57,3130.43 5639.37,3055.63 R5.1
NetC2_2: C2.2 D2.K R7.1 | length 240.5
  Top Layer w25: D2.K 5770.43,3130.87 C2.2 5889.76,3130.87 R7.1
NetC3_2: C3.2 D3.K R9.1 | length 240.5
  Top Layer w25: D3.K 6095.43,3130.87 C3.2 6214.76,3130.87 R9.1
NetQ7_1: Q7.1 Q10.3 R4.2 | length 242.3
  Top Layer w25: R4.2 5571.97,3284.37 Q7.1@5576.26,3280.08 ; Q10.3 Q7.1@5576.26,3280.08 ; Q7.1 Q7.1@5576.26,3280.08
NetQ8_1: Q8.1 Q11.3 R6.2 | length 244.3
  Top Layer w25: R6.2 5896.97,3284.37 Q8.1 5902.6,3376.26 Q11.3
NetQ9_1: Q9.1 Q12.3 R8.2 | length 246
  Top Layer w25: R8.2 6225.63,3284.37 Q9.1 6230,3373.86 Q12.3
NetR22_1: R22.1 U4.36 | length 108.6
  Top Layer w10: U4.36 6267.95,3896.42 R22.1@6285,3879.37
NJTRST: J1.5 U4.56 | length 451.2
  Top Layer w10: J1.5 5965.63,4564.37 6045,4485 6045,4305 6020,4280 6006.72,4280 5974.84,4248.13 U4.56
NRST: J1.8 U4.7 | length 996.2
  Top Layer w10: U4.7 5804.53,4014.53 5835,4045 5835,4115 5650,4300 5595,4300 5570,4325 5570,4455 5600,4485 5790,4485 5815.63,4510.63 J1.8
OSC_IN: C16.2 U4.3 XT1.2 | length 537.8
  Top Layer w10: 5685,4110 5701.73,4093.27 U4.3
  Top Layer w25: XT1.2 5475,4345 5570,4250 5570,4150 5590,4130 5630.43,4130 C16.2 5660.43,4134.57 5685,4110
OSC_OUT: C17.2 U4.4 XT1.1 | length 293.2
  Top Layer w10: 5680,4073.27 U4.4@5746.5,4073.27
  Top Layer w25: XT1.1 5519.57,4065.43 C17.2 5642.83,4073.27 5680,4073.27
PHASE_A: C1.1 Q1.2 Q4.3 R1.1 X1.1 | length 285
  Top Layer w25: R1.1 v1(5540,3019.47) C1.1
  Bottom Layer w25: X1.1 5445,2870 Q1.2
PHASE_B: C2.1 Q2.2 Q5.3 R2.1 X2.1 | length 262.7
  Top Layer w25: R2.1 v1(5865,3019.69) C2.1
  Bottom Layer w25: Q2.2 5860,2925 X2.1
PHASE_C: C3.1 Q3.2 Q6.3 R3.1 X3.1 | length 287.6
  Top Layer w25: R3.1 v1(6190,3019.69) C3.1
  Bottom Layer w25: Q3.2 6270,2865 X3.1
SENSE_11V1: C19.1 R19.2 U4.37 | length 810.2
  Top Layer w10: 6144.8,3916.1 U4.37
  Top Layer w15: 6144.8,3916.1 6144.7,3916 6122,3916 6102,3936 6102,4120 6178,4196 6178,4222 6195,4239 R19.2
  Top Layer w25: R19.2 6195,4501 6259.87,4565.87 C19.1
SENSE_A: R1.2 R10.2 R13.1 U4.39 | length 304.3
  Top Layer w10: U4.39 6249.53,3955.47 6250,3955
  Top Layer w25: R10.2 5446.5,2979.37 5525.24,2900.63 R1.2 R13.1
SENSE_B: R2.2 R11.2 R14.1 U4.40 | length 306.2
  Top Layer w10: U4.40 6251.84,3975.16 6252,3975
  Top Layer w25: R11.2 5776.5,2979.37 5855.24,2900.63 R2.2 R14.1 R14.1@5970,2900.63
SENSE_C: R3.2 R12.2 R15.1 U4.51 | length 237.6
  Top Layer w25: R12.2@6095,2979.37 6106.5,2979.37 6185.24,2900.63 R3.2 R15.1 R15.1@6300,2900.63
SENSE_X: R10.1 R11.1 R12.1 U4.38 | length 798.1
  Top Layer w10: U4.38 6249.79,3935.79 6250,3936
  Top Layer w25: R10.1 5435,2885 5460,2860 5724.37,2860 R11.1 5805.63,2860 6049.37,2860 R12.1
SIGNAL: H1.2 R22.2 | length 951.4
  Top Layer w10: R22.2@6285,3800.63 6335.63,3800.63 6370,3835 6370,4620 6322.5,4667.5
VCAP: C18.1 U4.30 | length 129.7
  Top Layer w10: 6065,3715 6074,3724 6074,3765.76 U4.30
  Top Layer w15: C18.1 6065,3715
VDDA: C6.1 C7.1 L1.2 U4.13 | length 383.7
  Top Layer w10: 5698.42,3896.42 U4.13
  Top Layer w15: 5686,3884 5698.42,3896.42
  Top Layer w25: L1.2 5465.47,3884.53 5530.43,3819.57 C6.1 C7.1 5661.57,3819.57 5686,3844 5686,3884
pads on no net: C1.0 C2.0 C3.0 C4.0 C5.0 C6.0 C7.0 C8.0 C9.0 C10.0 C11.0 C12.0 C13.0 C14.0 C15.0 C16.0 C17.0 C18.0 C19.0 C20.0 C21.0 D1.0 D2.0 D3.0 L1.0 R1.0 R2.0 R3.0 R4.0 R5.0 R6.0 R7.0 R8.0 R9.0 R10.0 R11.0 R12.0 R13.0 R14.0 R15.0 R16.0 R17.0 R18.0 R20.0 R21.0 R22.0 U4.1 U4.2 U4.5 U4.6 U4.14 U4.15 U4.16 U4.17 U4.20 U4.21 U4.22 U4.23 U4.26 U4.27 U4.29 U4.33 U4.34 U4.35 U4.41 U4.42 U4.43 U4.44 U4.45 U4.52 U4.53 U4.54 U4.57 U4.58 U4.59 U4.61 U4.62 XT1.0
copper on no net:
  other v1: 6285,3920 6285,3960 6285,4000

## Polygon pours and split planes (outlines as drawn)
PHASE_C on Bottom Layer "PHASE_C" (solid, pour order 4): 6050,2650 6370,2650 6370,3120 6230,3120 6210,3140 6210,3390 6180,3420 6070,3420 6050,3400
PHASE_B on Bottom Layer "PHASE_B" (solid, pour order 2): 5700,2650 6020,2650 6020,3120 5880,3120 5860,3140 5860,3380 5820,3420 5720,3420 5700,3400
PHASE_A on Bottom Layer "PHASE_A" (solid, pour order 0): 5670,2650 5670,3120 5540,3120 5520,3140 5520,3390 5490,3420 5380,3420 5350,3390 5350,2650
GND on GND (split plane): 6379.9,2640.1 5320.1,2640.1 5320.1,4829.9 6379.9,4829.9
3V3 on 11V1 (split plane): 6354.9,4617.89 6354.9,3687.11 6322.89,3655.1 5717.11,3655.1 5685.1,3687.11 5685.1,3785 5684.71,3786.95 5683.6,3788.6 5653.6,3818.6 5651.95,3819.71 5650,3820.1 5530,3820.1 5528.05,3819.71 5526.4,3818.6 5496.4,3788.6 5495.29,3786.95 5494.9,3785 5494.9,3692.11 5457.89,3655.1 5372.11,3655.1 5345.1,3682.11 5345.1,4577.89 5412.11,4644.9 6327.89,4644.9
11V1 on 11V1 (split plane): 6379.9,2640.1 5320.1,2640.1 5320.1,4829.9 6379.9,4829.9

## Other copper
11V1 (plane layer: these items are gaps in the copper):
  lines w10: 5340,3680 5370,3650 5460,3650 5500,3690 5500,3785 5530,3815 5650,3815 5680,3785 5680,3685 5715,3650 6325,3650 6360,3685 6360,4620 6330,4650 5410,4650 5340,4580 5340,3680

## Text inside footprints (layer, text, board x,y; h text height)
C21: Top Overlay "+" at 5740,4760 h60